# Altium PCB CH32H417MEU6-UHSIF-Top-R0.PcbDoc (part 2 of 2)
Units mil, origin at the board's own origin, x right, y up, seen from the top; angles counter-clockwise.
Board outline 2559.06 x 1771.65 mil, 4 copper layers (Top Layer, Layer 1, Layer 2, Bottom Layer), stack 23.756 mil thick; 56 components, 86 nets, 278 pads, 495 vias.
Unrouted connection lines stored in the file: 33.
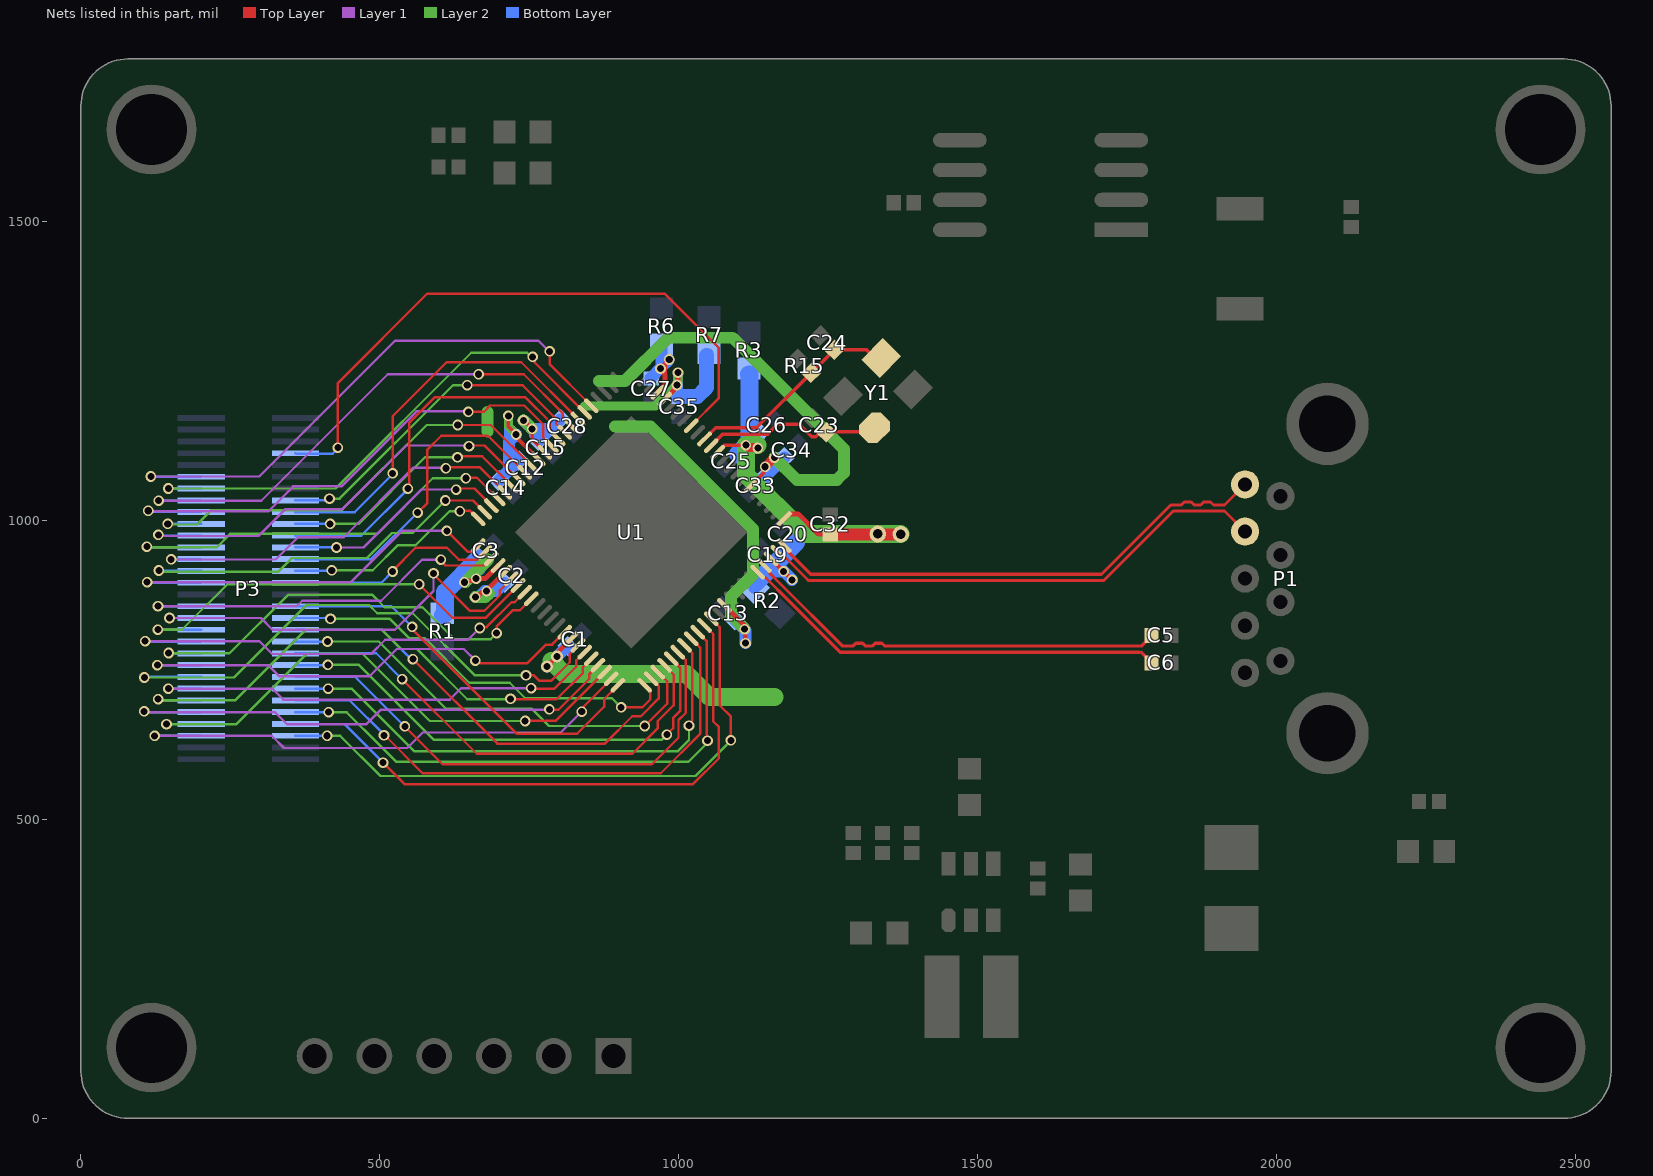
[diagram p4: the nets of this part, all layers, seen from the top]

## Via types
v1: diameter 17.72, hole 11.81, Top Layer to Bottom Layer, tented both sides, 470 vias
v2: diameter 23.62, hole 11.81, Top Layer to Bottom Layer, tented both sides, 12 vias
v3: diameter 28, hole 16, Top Layer to Bottom Layer, tented both sides, 10 vias
v4: diameter 19.68, hole 11.81, Top Layer to Bottom Layer, tented both sides, 3 vias

## Nets (pads, with @x,y where several pads share a name; then routed paths per layer and width w, separated by ;. In a path a pad name is that pad's centre, name@x,y a point inside that pad or via, vN(x,y) a via of type N, cw(c..) or ccw(c..) an arc to the next point about the centre after c; other vN are vias at no path point) (continued)
UFP6: P3.11 U1.27 | length 972.7
  Top Layer w4: v1(783.78,1282.63) 783.78,1261.5 U1.27@853.59,1191.68
  Layer 1 w4: v1(116.91,1073.29) 298.23,1073.29 525.38,1300.44 765,1300.44 782.81,1282.63 v1(783.78,1282.63)
  Bottom Layer w4: v1(116.91,1073.29) 117.37,1072.83 P3.11@201.26,1072.83
UFP7: P3.13 U1.28 | length 889.9
  Top Layer w4: v1(755.45,1273.24) 758.07,1270.62 758.07,1264.93 U1.28@842.45,1180.55
  Layer 2 w4: v1(146.21,1053.15) 425.65,1053.15 652.67,1280.17 746.25,1280.17 753.17,1273.24 v1(755.45,1273.24)
  Bottom Layer w4: v1(146.21,1053.15) P3.13@201.26,1053.15
UFP8: P3.18 U1.29 | length 672.4
  Top Layer w4: v1(521.35,1078.57) 521.35,1174.07 611.56,1264.28 736.45,1264.28 U1.29@831.32,1169.41
  Bottom Layer w4: P3.18@358.74,1013.78 457.98,1013.78 521.35,1077.14 v1(521.35,1078.57)
UFP9: P3.15 U1.30 | length 888.6
  Top Layer w4: v1(665.11,1244.27) 740.53,1244.27 806.09,1178.71 806.09,1172.37 U1.30@820.18,1158.28
  Layer 1 w4: v1(130.07,1032.96) 130.35,1032.67 301.55,1032.67 513.15,1244.27 v1(665.11,1244.27)
  Bottom Layer w4: v1(130.07,1032.96) 200.75,1032.96 P3.15@201.26,1033.46
UFP10: P3.16 U1.31 | length 567.7
  Top Layer w4: v1(646.1,1226.01) 738.64,1226.01 795.09,1169.57 795.09,1161.1 U1.31@809.05,1147.14
  Layer 2 w4: v1(415.8,1036.29) 432.7,1036.29 622.42,1226.01 v1(646.1,1226.01)
  Bottom Layer w4: P3.16@358.74,1033.46 409.26,1033.46 412.09,1036.29 v1(415.8,1036.29)
UFP11: P3.22 U1.32 | length 636.2
  Top Layer w4: v1(546.86,1052.86) 548.8,1054.79 548.8,1162.82 591.57,1205.6 743.5,1205.6 784.09,1165.01 784.09,1149.83 U1.32@797.91,1136.01
  Bottom Layer w4: P3.22@358.74,974.41 468.85,974.41 546.86,1052.42 v1(546.86,1052.86)
UFP12: P3.17 U1.33 | length 878.4
  Top Layer w4: v1(647.99,1181.43) 673.67,1181.43 684.34,1192.1 741.44,1192.1 773.09,1160.45 773.09,1138.56 U1.33@786.78,1124.87
  Layer 1 w4: v1(112.66,1016.02) 113.74,1014.94 313.26,1014.94 355.15,1056.83 435.67,1056.83 561.01,1182.18 647.24,1182.18 v1(647.99,1181.43)
  Bottom Layer w4: v1(112.66,1016.02) 114.64,1014.04 P3.17@201,1014.04
UFP13: P3.19 U1.36 | length 761.7
  Top Layer w4: v1(630.17,1159.4) 685.44,1159.4 U1.36@753.37,1091.47
  Layer 2 w4: v1(145.23,994.01) 146.22,993.03 194.2,993.03 218.28,1017.11 436.05,1017.11 578.33,1159.4 v1(630.17,1159.4)
  Bottom Layer w4: v1(145.23,994.01) 145.31,994.09 P3.19@201.26,994.09
UFP14: P3.26 U1.37 | length 546.7
  Top Layer w4: v1(563.27,1012.91) 579.53,1029.17 579.53,1118.39 602.69,1141.56 680.56,1141.56 741.79,1080.33 U1.37@742.23,1080.33
  Bottom Layer w4: P3.26@358.74,935.04 485.39,935.04 v1(563.27,1012.91)
UFP15: P3.21 U1.38 | length 761.3
  Top Layer w4: v1(649.11,1123.94) 650.32,1125.15 675.15,1125.15 U1.38@731.1,1069.19
  Layer 1 w4: v1(129.61,975.67) 131.47,973.81 297.06,973.81 342.06,1018.81 437.74,1018.81 544.08,1125.15 647.9,1125.15 v1(649.11,1123.94)
  Bottom Layer w4: v1(129.61,975.67) 130.87,974.41 P3.21@201.26,974.41
UFP16: P3.20 U1.39 | length 428.3
  Top Layer w4: v1(629.85,1105.35) 631.57,1107.08 670.94,1107.08 U1.39@719.96,1058.06
  Layer 2 w4: v1(416.84,994.08) 464.24,994.08 575.51,1105.35 v1(629.85,1105.35)
  Bottom Layer w4: P3.20@358.74,994.09 v1(416.84,994.08)
UFP17: P3.25 U1.40 | length 690.5
  Top Layer w4: v1(610.42,1087.1) 611.74,1088.43 667.32,1088.43 U1.40@708.83,1046.92
  Layer 1 w4: v1(150.89,934.7) 151.14,934.46 325.93,934.46 363.04,971.56 439.61,971.56 556.29,1088.24 609.28,1088.24 v1(610.42,1087.1)
  Bottom Layer w4: v1(150.89,934.7) 151.06,934.87 201.09,934.87 P3.25@201.26,935.04
UFP18: P3.23 U1.41 | length 742
  Top Layer w4: v1(643.87,1070.38) 644.61,1071.12 662.36,1071.12 U1.41@697.69,1035.79
  Layer 2 w4: v1(110.39,955.88) 111.54,954.72 227.09,954.72 249.58,977.22 495.5,977.22 588.53,1070.25 617.4,1070.25 617.53,1070.38 v1(643.87,1070.38)
  Bottom Layer w4: v1(110.39,955.88) 111.54,954.72 P3.23@201.26,954.72
UFP19: P3.24 U1.42 | length 380.5
  Top Layer w4: v1(627.48,1051.46) 629.17,1053.14 658.07,1053.14 U1.42@686.56,1024.65
  Layer 1 w4: v1(427.41,954.55) 472.83,954.55 569.74,1051.46 v1(627.48,1051.46)
  Bottom Layer w4: P3.24@358.74,954.72 427.23,954.72 v1(427.41,954.55)
UFP20: P3.27 U1.43 | length 674.8
  Top Layer w4: v1(609.4,1033.21) 655.73,1033.21 U1.43@675.42,1013.52
  Layer 2 w4: v1(130.43,916.12) 132.81,913.73 329.55,913.73 352.87,937.05 478.7,937.05 520.42,978.78 554.97,978.78 v1(609.4,1033.21)
  Bottom Layer w4: v1(130.43,916.12) 131.19,915.35 P3.27@201.26,915.35
UFP21: P3.28 U1.44 | length 352.6
  Top Layer w4: v1(633.9,1015.13) 634.49,1015.72 650.94,1015.72 U1.44@664.28,1002.38
  Layer 2 w4: v1(419.54,916.43) 488.11,916.43 530.21,958.53 559.86,958.53 616.45,1015.13 v1(633.9,1015.13)
  Bottom Layer w4: P3.28@358.74,915.35 418.46,915.35 v1(419.54,916.43)
UFP22: P3.29 U1.45 | length 699.5
  Top Layer w4: v1(611.97,982.42) 647.23,947.15 652.55,947.15 663.24,957.84 U1.45@664.28,957.84
  Layer 1 w4: v1(110.65,896.57) 110.95,896.27 450.83,896.27 536.98,982.42 v1(611.97,982.42)
  Bottom Layer w4: v1(110.65,896.57) 111.55,895.67 P3.29@201.26,895.67
UFP23: P3.30 U1.46 | length 355.1
  Top Layer w4: v1(521.23,914.37) 521.23,915.46 559.8,954.03 612.08,954.03 632.13,933.98 662.7,933.98 U1.46@675.42,946.7
  Bottom Layer w4: P3.30@358.74,895.67 502.53,895.67 v1(521.23,914.37)
UFP24: P3.33 U1.47 | length 672.5
  Top Layer w4: v1(602.05,934.38) 602.05,932.18 609.8,924.43 674.37,924.43 685.51,935.57 U1.47@686.56,935.57
  Layer 1 w4: v1(128.86,856.52) 361,856.52 370.07,865.58 502.18,865.58 570.98,934.38 v1(602.05,934.38)
  Bottom Layer w4: v1(128.86,856.52) 129.07,856.3 P3.33@201.26,856.3
UFP25: P3.35 U1.50 | length 743.9
  Top Layer w4: v1(589.69,911.34) 589.69,909.72 650.89,848.53 674.55,848.53 700.77,874.75 700.77,882.97 U1.50@719.96,902.16
  Layer 1 w4: v1(148.11,836.61) 301.01,836.61 320.93,816.69 524.87,816.69 589.69,881.51 v1(589.69,911.34)
  Bottom Layer w4: v1(148.11,836.61) P3.35@201.26,836.61
UFP26: P3.37 U1.51 | length 752.8
  Top Layer w4: v1(565.63,893.09) 621.88,836.84 676.91,836.84 711.77,871.7 U1.51@731.1,891.03
  Layer 2 w4: v1(128.58,817.27) 128.92,816.93 168.73,816.93 244.65,892.85 419.7,892.85 565.38,892.85 v1(565.63,893.09)
  Bottom Layer w4: v1(128.58,817.27) 128.92,816.93 P3.37@201.26,816.93
UFP27: P3.39 U1.52 | length 780.7
  Top Layer w4: v1(666.98,819.87) 668.47,821.36 678.5,821.36 720.11,862.97 725.32,862.97 U1.52@742.23,879.89
  Layer 1 w4: v1(107.43,797.95) 298.33,797.95 319.92,776.36 485.07,776.36 508.93,800.22 647.33,800.22 v1(666.98,819.87)
  Layer 2 w4: v1(107.43,797.95) v1@108.14,797.24
  Bottom Layer w4: v1@108.14,797.24 P3.39@201.26,797.24
UFP28: P3.41 U1.53 | length 767.1
  Top Layer w4: v1(695.23,811.36) 695.71,811.84 695.71,823.02 722.02,849.33 733.94,849.33 U1.53@753.37,868.75
  Layer 2 w4: v1(146.76,778.11) 147.31,777.56 248.44,777.56 346.24,875.36 487.59,875.36 508.24,854.71 571.06,854.71 624.36,801.42 685.29,801.42 v1(695.23,811.36)
  Bottom Layer w4: v1(146.76,778.11) 147.31,777.56 P3.41@201.26,777.56
UFP29: P3.43 U1.58 | length 813.5
  Top Layer w4: v1(659.72,765.38) 663.1,765.38 667.79,760.69 746.1,760.69 777.53,792.12 788.08,792.12 U1.58@809.05,813.08
  Layer 1 w4: v1(127.91,757.71) 128.07,757.87 313.16,757.87 331.99,739.04 482.35,739.04 528.1,784.79 640.31,784.79 v1(659.72,765.38)
  Layer 2 w4: v1(127.91,757.71) v1@128.46,757.16
  Bottom Layer w4: v1@128.46,757.16 200.54,757.16 P3.43@201.26,757.87
UFP30: P3.45 U1.60 | length 958.4
  Top Layer w4: v1(744.33,740.74) 757.67,740.74 767.02,731.39 786.34,731.39 817.45,762.5 817.45,776.94 U1.60@831.32,790.81
  Layer 2 w4: v1@107.12,738.19 v1(106.05,737.12) 255.93,737.12 377.22,858.41 481.93,858.41 495.66,844.69 554.95,844.69 658.9,740.74 v1(744.33,740.74)
  Bottom Layer w4: v1(106.05,737.12) 107.12,738.19 P3.45@201.26,738.19
UFP31: P3.47 U1.61 | length 798.9
  Top Layer w4: v1(752.83,719.22) 753.88,718.17 791.37,718.17 828.45,755.26 828.45,765.67 U1.61@842.45,779.67
  Layer 1 w4: v1(146.24,718.64) 146.43,718.45 320.29,718.45 338.69,700.05 616.64,700.05 635.81,719.22 v1(752.83,719.22)
  Layer 2 w4: v1(146.24,718.64) v1@146.38,718.5
  Bottom Layer w4: v1@146.38,718.5 P3.47@201.26,718.5
UFP32: P3.49 U1.62 | length 929.3
  Top Layer w4: v1(718.42,701.4) 719.05,700.77 795.31,700.77 839.45,744.91 839.45,754.4 U1.62@853.59,768.53
  Layer 2 w4: v1(129.11,700.82) 131.11,698.82 257.9,698.82 375.77,816.69 503.49,816.69 535.38,784.79 562.05,784.79 646.08,700.77 717.78,700.77 v1(718.42,701.4)
  Bottom Layer w4: v1(129.11,700.82) 131.11,698.82 P3.49@201.26,698.82
UFP33: P3.51 U1.63 | length 910.2
  Top Layer w4: v1(783.37,683.81) 783.98,683.19 798.71,683.19 850.45,734.93 850.45,743.13 U1.63@864.72,757.4
  Layer 1 w4: v1(105.8,680.42) 107.09,679.13 324.5,679.13 345.01,658.63 476.82,658.63 501.1,682.9 782.46,682.9 v1(783.37,683.81)
  Layer 2 w4: v1(105.8,680.42) v1@107.09,679.13
  Bottom Layer w4: v1@107.09,679.13 P3.51@201.26,679.13
UFP34: P3.53 U1.64 | length 920.5
  Top Layer w4: v1(742.94,664.31) 743.63,665 794.6,665 U1.64@875.86,746.26
  Layer 2 w4: v1(143.16,659.17) 260.19,659.17 378.2,777.18 470.46,777.18 583.33,664.31 v1(742.94,664.31)
  Bottom Layer w4: v1(143.16,659.17) 143.44,659.45 P3.53@201.26,659.45
UFP35: P3.55 U1.65 | length 901.4
  Top Layer w4: v1(837.56,680.14) 840.18,682.76 840.18,687.53 887,734.34 U1.65@887,735.13
  Layer 1 w4: v1(123.27,639.64) 319.08,639.63 339.4,619.31 545.84,619.31 571.64,645.12 802.54,645.12 v1(837.56,680.14)
  Layer 2 w4: v1(123.27,639.64) v1@123.4,639.76
  Bottom Layer w4: v1@123.4,639.76 P3.55@201.26,639.76
UFP36: P3.34 U1.66 | length 669.7
  Top Layer w4: v1@551.89,819.87 728.55,643.2 829.98,643.2 875.21,688.43 875.21,701.07 U1.66@898.13,723.99
  Bottom Layer w4: P3.34@358.74,856.3 519.5,856.3 v1(553.91,821.89)
UFP37: P3.36 U1.67 | length 688.3
  Top Layer w4: v1(903.38,687.19) 938.68,687.19 952.33,700.84 952.33,711.59 951.77,712.16 951.77,714.9 U1.67@942.67,723.99
  Layer 2 w4: v1(417.42,835.15) 516.8,835.15 548.96,802.99 574.64,802.99 649.26,728.37 717.19,728.37 743.2,702.36 888.21,702.36 v1(903.38,687.19)
  Bottom Layer w4: P3.36@358.74,836.61 415.96,836.61 v1(417.42,835.15)
UFP38: P3.38 U1.68 | length 755.8
  Top Layer w4: v1(555.07,767.93) 696.49,626.52 876.43,626.52 922.18,672.27 936.49,672.27 966.13,701.91 966.13,722.81 U1.68@953.81,735.13
  Bottom Layer w4: P3.38@358.74,816.93 503.29,816.93 552.28,767.93 v1(555.07,767.93)
UFP39: P3.40 U1.69 | length 755.1
  Top Layer w4: v1(942.98,656) 980.5,693.52 980.5,730.71 U1.69@964.94,746.26
  Layer 2 w4: v1(412.46,797.32) 438.57,797.32 438.62,797.27 498.2,797.27 610.93,684.55 754.35,684.55 782.9,656 v1(942.98,656)
  Bottom Layer w4: P3.40@358.74,797.24 412.38,797.24 v1(412.46,797.32)
UFP40: P3.42 U1.70 | length 816
  Top Layer w4: v1(537.23,734.26) 661.91,609.58 922.34,609.58 964.53,651.77 964.53,663.89 991.5,690.87 991.5,741.98 U1.70@976.08,757.4
  Bottom Layer w4: P3.42@358.74,777.56 493.93,777.56 v1(537.23,734.26)
UFP41: P3.44 U1.71 | length 819
  Top Layer w4: v1(979.83,641.56) 990.45,652.18 990.45,669.66 1002.5,681.71 1002.5,753.25 U1.71@987.22,768.53
  Layer 2 w4: v1(412.94,758.19) 464.79,758.19 589.64,633.34 971.57,633.34 v1(979.83,641.56)
  Bottom Layer w4: P3.44@358.74,757.87 412.63,757.87 v1(412.94,758.19)
UFP42: P3.46 U1.72 | length 873.3
  Top Layer w4: v1(541.7,655.32) 604.97,592.06 955.12,592.06 999.45,636.39 999.45,665.93 1011.5,677.99 1011.5,766.52 U1.72@998.35,779.67
  Bottom Layer w4: P3.46@358.74,738.19 458.84,738.19 v1(541.7,655.32)
UFP43: P3.48 U1.73 | length 875.4
  Top Layer w4: U1.73@1009.49,790.81 1022.6,777.69 1022.6,665.71 1016.89,660 v1(1016.89,656.51)
  Layer 2 w4: v1(413.6,718.5) 452.74,718.5 557.66,613.59 997.72,613.59 1016.89,632.76 v1(1016.89,656.51)
  Bottom Layer w4: P3.48@358.74,718.5 v1(413.6,718.5)
UFP44: P3.50 U1.74 | length 920.4
  Top Layer w4: v1(506.96,640.45) 508.07,640.45 571.52,577 969.61,577 1035.5,642.88 1035.5,787.06 U1.74@1020.62,801.94
  Bottom Layer w4: P3.50@358.74,698.82 449.7,698.82 506.96,641.56 v1(506.96,640.45)
UFP45: P3.52 U1.75 | length 928.7
  Top Layer w4: U1.75@1031.76,813.08 1046.5,798.33 1046.5,632.94 v1(1047.97,631.47)
  Layer 2 w4: v1(414.37,679.13) 444.43,679.13 499.98,623.59 500.23,623.59 527.9,595.91 1015.8,595.91 1047.97,628.08 v1(1047.97,631.47)
  Bottom Layer w4: P3.52@358.74,679.13 v1(414.37,679.13)
UFP46: P3.54 U1.76 | length 1000
  Top Layer w4: v1(505.26,594.71) 505.47,594.71 541.44,558.75 1023.56,558.75 1066.89,602.07 1066.89,654.09 1057.5,663.47 1057.5,809.6 U1.76@1042.89,824.21
  Bottom Layer w4: P3.54@358.74,659.45 440.74,659.45 505.26,594.93 v1(505.26,594.71)
UFP47: P3.56 U1.77 | length 998.1
  Top Layer w4: U1.77@1054.03,835.35 1068.5,820.88 1068.5,690.34 1087.07,671.76 v1(1087.07,631.85)
  Layer 2 w4: v1(411.71,639.76) 433.39,639.76 500.76,572.39 1027.61,572.39 v1(1087.07,631.85)
  Bottom Layer w4: P3.56@358.74,639.76 v1(411.71,639.76)
UFPCLK: P3.8 U1.15 | length 1070.3
  Top Layer w4: v1(429.83,1121.57) 429.83,1229.61 579.35,1379.12 975.75,1379.12 1066.89,1287.98 1066.89,1204.55 U1.15@1020.62,1158.28
  Bottom Layer w4: P3.8@358.74,1112.2 359.74,1111.2 420.89,1111.2 429.83,1120.14 v1(429.83,1121.57)
USB_SSRX_n: P1.6 U1.87 | length 863.2
  Top Layer w5.1: U1.87@1165.38,946.7 1174.27,937.82 1178.26,937.82 1213.43,902.65 1216.39,899.69 1710.99,899.69 1826.87,1015.57 1912.62,1015.57 P1.6@1946.94,981.25
USB_SSRX_p: P1.5 U1.88 | length 863.1
  Top Layer w5.1: U1.88@1176.52,957.84 1185.4,948.96 1185.4,944.96 1220.58,909.79 1706.8,909.79 1822.69,1025.67 1840.33,1025.67 1845.3,1030.65 1856.82,1030.65 1861.8,1025.67 1872.71,1025.67 1877.69,1030.65 1889.2,1030.65 1894.18,1025.67 1912.62,1025.67 P1.5@1946.94,1059.99
USB_SSTX_n: C6.1 U1.84 | length 719
  Top Layer w5.1: U1.84@1131.98,913.3 1140.86,904.41 1144.85,904.41 1163.38,885.89 1165.47,883.8 1269.92,779.35 1770.48,779.35 ; 1773.44,779.35 1790.41,762.39 C6.1@1790.41,761.4
USB_SSTX_p: C5.1 U1.85 | length 721.6
  Top Layer w5.1: U1.85@1143.11,924.43 1151.99,915.55 1151.99,911.56 1167.56,895.99 1274.1,789.45 1291,789.45 1295.98,794.43 1307.49,794.43 1312.47,789.45 1323.38,789.45 1328.36,794.43 1339.88,794.43 1344.85,789.45 1773.29,789.45 ; 1773.44,789.45 1790.41,806.42 C5.1@1790.41,807.4
VDD12A: C19.2 C20.2 R2.1 U1.86 | length 226.7
  Top Layer w7: U1.86@1154.25,935.57 v1(1175.3,914.52) v1(1189.44,900.37)
  Bottom Layer w20: R2.1@1126.29,886.55 R2.1@1126.29,897.14 ; 1144.37,910.98 1147.91,914.52 v1(1175.3,914.52) ; C19.2@1160.1,930.95 1158.2,929.05 1160.76,929.05 v1(1175.3,914.52) ; v1(1189.44,900.37) v1(1175.3,914.52)
  Bottom Layer w30: R2.1@1128.41,895.02 1144.37,910.98 ; 1147.91,914.52 C19.2@1160.32,926.93 ; C19.2@1162.22,928.82 C20.2@1196.17,962.78
VDD33: C1.1 C25.2 C26.2 C32.2 R3.1 U1.1 U1.11 U1.59 | length 1305
  Top Layer w6: U1.11@1065.16,1113.74 1077.24,1125.81 v1(1111.98,1125.81)
  Top Layer w8: v4@780.81,757.92 781.76,757.92 v4(796.08,772.25) ; U1.59@820.18,801.94 798.32,780.08 v4@798.32,771.18 ; U1.1@1176.52,1002.38 1184.78,1010.64 1199.38,1010.64 1233.49,976.53 C32.2@1253.13,976.53 ; v4@798.28,771.14 v4@798.32,771.18
  Top Layer w15: v1(1111.98,1125.81) 1112.71,1125.81 1117.13,1121.4 1131.61,1121.4 v1(1132.13,1120.88)
  Top Layer w20: C32.2@1253.13,976.53 1299.15,976.53 1370.87,976.53 v3(1371.12,976.78)
  Layer 2 w30: 786.8,764.76 808.33,743.22 1012.64,743.22 1051.29,704.57 1160.07,704.57 ; v1@1131.65,1125.81 v1(1111.98,1125.81) 1111.98,1076.79 1211.55,977.21 1300.87,977.21 v3(1332.57,977.21) v3@1370.55,977.21
  Bottom Layer w20: v4(779.36,755.52) 813.09,789.25 C1.1@814.64,789.25
  Bottom Layer w30: C25.2@1099.17,1110.9 1118.3,1130.04 1118.3,1243.62 R3.1@1117.6,1244.32
VDD33A: C27.2 R6.1 U1.20 | length 171.4
  Top Layer w8: U1.20@964.94,1213.96 976.81,1225.82 976.81,1243.56 976.02,1244.36 ; 976.02,1260.32 976.02,1244.36 ; v1@983.37,1272.16 983.37,1268.6 969.34,1254.57 v1(969.34,1253.66) 969.34,1251.03 976.02,1244.36
  Bottom Layer w20: C27.2@952.82,1237.89 v1@970.84,1255.91 ; v1(969.34,1253.66) 970.84,1255.15 v1@970.84,1255.91 ; R6.1@970.84,1293.86 v1@970.84,1255.91 ; v1@982.9,1267.97 v1@970.84,1255.91
  other v1: 983.9,1268.97
VDDIO: C12.1 C14.1 C35.2 R7.1 U1.19 U1.35 | length 757.2
  Top Layer w6: v1(714.75,1174.78) 714.75,1156.76 727.86,1143.65 v1(727.86,1143.52) ; v1@727.92,1143.59 730.16,1141.35 730.16,1136.94 U1.35@764.5,1102.6
  Top Layer w8: U1.19@984.39,1211.13 997.05,1223.79 997.05,1227.41 998.91,1229.28 998.77,1229.42 998.77,1246.98 v1(998.62,1247.12)
  Layer 2 w15: v1(714.75,1174.78) 715.27,1174.26 715.27,1165.55 715.27,1156.85 727.86,1144.26 v1(727.86,1143.52) ; 842.39,1191.26 960.9,1191.26 998.91,1229.27 998.77,1229.41 998.77,1246.98 v1(998.62,1247.12)
  Bottom Layer w15: v1(714.75,1174.78) 715.27,1174.26 715.27,1156.85 ; 716.24,1115.34 715.27,1116.31 715.27,1156.85 ; v1(727.86,1143.52) 727.86,1144.26 715.27,1156.85 ; v1@998.62,1223.22 v1(998.62,1247.12) ; v1@998.91,1229.27 999.43,1228.75 999.43,1207.61 C35.2@1000.31,1206.73 ; R7.1@1046.29,1275.34 R7.1@1050.61,1279.67
  Bottom Layer w20: v1(727.86,1143.52) 716.24,1131.91 716.24,1115.34 ; 716.24,1115.34 716.24,1083.69 C14.1@699.07,1066.51 C12.1@732.07,1099.51 716.24,1115.34
  Bottom Layer w25: C35.2@1000.31,1206.73 1030.89,1206.73 1046.29,1222.13 R7.1@1046.29,1275.34
  other v1: 996.91,1226.27
VDDK: C3.2 C33.2 C34.2 R1.1 U1.6 U1.48 | length 1112.9
  Top Layer w6: U1.6@1120.84,1058.06 1142.02,1079.24 1142.02,1087.33 v1(1144.26,1089.57)
  Top Layer w8: v1@643.47,897.12 645.33,898.98 654.91,898.98 658.44,902.51 v1(661.07,902.51) 675.77,902.51 U1.48@697.69,924.43
  Top Layer w15: v1(1144.26,1089.57) v1(1159.8,1105.11)
  Layer 2 w20: v1@643.47,897.12 654.96,908.62 680.78,934.43 ; 679.73,1148.17 679.73,1159.8 679.73,1180.83 ; 866.29,1232.98 909.95,1232.98 982.31,1305.34 1090.05,1305.34 1276.08,1119.3 1276.08,1079.35 1264.37,1067.63 1197.28,1067.63 v1(1159.8,1105.11)
  Bottom Layer w20: v1@655.92,907.66 666.3,918.04 666.3,933.63 667,934.33 667,936.89 C3.2@666.3,937.59 ; C33.2@1140.65,1069.42 C34.2@1176.66,1105.44
  Bottom Layer w30: R1.1@605.33,841.21 608.55,844.42 608.55,879.83 C3.2@664.89,936.17
  other v1: 641.35,896.42
VIO18: C2.1 C13.1 C15.2 C28.2 U1.34 U1.49 U1.79 | length 990.2
  Top Layer w6: v1(740.19,1167.22) 740.32,1167.22 754.59,1152.95 v1(754.72,1152.95) 754.72,1134.65 U1.34@775.64,1113.74
  Top Layer w8: v1(659.77,871.51) 662.4,871.51 670.63,879.74 676.54,879.74 v1(678.39,881.6) 678.39,882.78 708.83,913.21 U1.49@708.83,913.3 ; U1.79@1076.3,857.62 v1@1108.27,825.65 ; v1(1110.13,818.16) 1108.27,820.02 v1@1108.27,825.65 ; v1(1111.5,794.5) 1111.02,794.98 1111.02,822.9 v1@1108.27,825.65
  Layer 2 w20: v1(659.77,871.51) 676.43,871.51 v1@682.45,877.54 ; v1(740.19,1167.22) 740.45,1167.22 v1(754.72,1152.95) ; 893.02,1156.62 952.69,1156.62 1124.02,985.29 1124.02,908.94 1087.02,871.93 1087.02,841.27 v1(1110.13,818.16)
  Bottom Layer w20: v1(659.77,871.51) 665.49,871.51 675.58,881.6 v1(678.39,881.6) 694.59,881.6 C2.1@708.44,895.45 ; v1(740.19,1167.22) 747.33,1160.09 747.59,1160.09 v1(754.72,1152.95) ; C15.2@765.7,1133.14 C15.2@766.39,1133.84 ; C28.2@801.39,1168.84 783.44,1150.88 ; C13.1@1094.58,833.01 v1@1109.44,818.16 ; v1(1110.13,818.16) v1@1109.44,818.16 ; v1(1111.5,794.5) 1111.5,816.09 1109.78,817.81 v1@1109.44,818.16 ; v1(754.72,1152.95) 781.36,1152.95 783.44,1150.88 ; v1(754.72,1152.95) 759.68,1148 759.68,1143.12 766.39,1136.4 C15.2@766.39,1133.84 ; C15.2@766.39,1133.84 783.44,1150.88
XI: C23.2 U1.12 Y1.1 | length 303
  Top Layer w6: U1.12@1054.03,1124.87 1072.83,1143.67 1147.65,1143.67 1164.64,1160.65 1201.52,1160.65 1222.37,1139.81 1228.89,1139.81 1234.58,1145.5 1240.41,1145.5 1242.74,1147.83 1320.56,1147.83 Y1.1@1327.41,1154.68
XO: C24.2 R15.2 U1.13 Y1.3 | length 363.8
  Top Layer w6: U1.13@1042.89,1136.01 1061.56,1154.67 1129.69,1154.67 R15.2@1221.48,1246.47 C24.2@1260.38,1285.36 1261.07,1286.05 1273.53,1286.05 1274.23,1285.36 1313.92,1285.36 1327.67,1271.6 Y1.3@1338.55,1271.6
pads on no net: ?.0 U1.7 U1.8 U1.9 U1.10 U1.21 U2.1

## Polygon pours and split planes (outlines as drawn)
GND on Layer 2 "GND" (solid, remove dead copper, pour order 15): -4.21,1780.03 -4.21,0 2559.06,0 2559.06,1770.64
+5V on Layer 2 "+5V" (solid, remove dead copper, pour order 2): 2163.63,568.73 2127.51,532.61 1985.62,532.61 1975.2,522.18 1975.2,390.57 1985.62,380.15 2239.72,380.15 2256.54,396.97 2256.54,429.43 2256.54,808.06 2251.11,813.49 2006.24,813.49 1980.56,787.8 1980.56,738.05 1990.12,729.02 2139.43,729.02 2163.63,704.83
VIO18 on Layer 2 "VIO18" (solid, remove dead copper, pour order 14): 747.45,1043.62 846.39,1142.55 947.08,1142.55 1107.83,981.8 1107.83,937 1070.94,900.1 1070.94,801.03 1086.49,785.48 1114.99,785.48 1123.14,793.62 1123.14,873.95 1145.89,896.7 1145.89,1002.02 977.37,1170.54 762.23,1170.54 749.03,1183.74 735.27,1183.74 724.03,1172.51 724.03,1169.7 724.93,1162.84 748.55,1139.21 749.18,1121.7 708.83,1081.34 708.83,891.03 701.33,883.53 648.34,883.53 644.16,879.34 644.16,859.8 648.9,855.05 732.1,855.05 747.45,870.41
VDDK on Layer 2 "VDDK" (solid, remove dead copper, pour order 12): 628.36,894.63 628.36,910 640.64,922.28 664.15,922.28 666.6,924.73 666.6,1095.82 666.6,1219.43 704.15,1256.98 914.34,1256.98 980.5,1323.13 1119.99,1323.13 1295.48,1147.64 1295.48,1054.05 1293.61,1052.17 1172.24,1052.17 1133.38,1091.03 1132.77,1094.63 1132.77,1099.66 1152.74,1119.63 1174.62,1119.63 1207.69,1086.56 1229.19,1086.56 1240.24,1097.62 1240.24,1124.55 1080.18,1284.61 981.38,1284.61 914.73,1217.96 852.64,1217.96 847.27,1223.33 722.68,1223.33 700.84,1201.49 700.84,1108.49 700.84,909.5 680.86,889.53 633.46,889.53
VDD33 on Layer 2 "VDD33" (solid, remove dead copper, pour order 10): 1275.84,781.9 1275.84,877.51 1297.56,899.23 1373.32,899.23 1386.14,912.05 1386.14,985.3 1381.36,990.08 1225.34,990.08 1132.77,1082.65 1132.77,1106.61 1134.77,1108.6 1138.01,1108.6 1148.99,1119.58 1148.99,1143.54 1143.25,1149.28 1087.1,1149.28 1083.59,1145.78 1083.59,1074.29 1218.26,939.62 1218.26,799.58 1153.48,734.8 1063.79,734.8 1022.18,776.4 833.24,776.4 825.98,783.66 769.08,783.66 761.82,776.4 761.82,749.15 786.48,724.48 1000.47,724.48 1045.84,679.11 1173.05,679.11
VDDIO on Layer 2 "VDDIO" (solid, remove dead copper, pour order 13): 710.09,1122.25 738.1,1122.25 743.24,1127.39 743.24,1142.91 727.06,1159.09 727.06,1173.27 742.14,1188.35 810.65,1188.35 820.89,1178.11 977.08,1178.11 1013.71,1214.74 1013.71,1250.73 1007.18,1257.26 992.66,1257.26 986.04,1250.64 986.04,1236.87 960.7,1211.53 849.13,1211.53 845.93,1214.74 723.18,1214.74 704.19,1195.75 704.19,1125.07
GND on Bottom Layer "GND" (solid, remove dead copper, pour order 17): 7.41,1771.65 7.41,0 2559.06,0 2559.06,1771.65
3V3 on Bottom Layer "3V3" (solid, remove dead copper, pour order 16): 1545.99,561.43 1566.09,541.33 1566.09,493.75 1561.28,489 1477.21,489 1471.55,494.66 1471.55,1246.66 1327.72,1390.49 1164.31,1390.49 1149.07,1375.24 1149.07,1304.57 1142.66,1298.16 1106.33,1298.16 1083.25,1321.23 1031.81,1321.23 1016.89,1336.15 957.06,1336.15 949.68,1343.54 949.68,1432.4 934.2,1448.81 818.25,1448.81 789.6,1420.16 558.63,1420.16 543.07,1405.32 543.07,1185.32 523.13,1166.28 135.57,1166.28 129.84,1172.01 129.84,1252.57 150.32,1273.05 442.44,1273.05 453.9,1284.51 453.9,1509.32 458.68,1515.6 744.93,1515.6 811.88,1582.55 1407.76,1582.55 1420.02,1570.65 1420.02,1429.11 1545.99,1303.14
1V2 on Bottom Layer "1V2" (solid, remove dead copper, pour order 11): 1176.7,434.19 1164.01,421.5 650.88,421.5 635.36,437.03 635.36,793.08 625.65,802.78 585.39,802.78 574.41,791.8 574.41,357.2 593.58,338.02 1155.24,338.02 1166.5,326.76 1166.5,261.85 1173.95,254.39 1283.28,254.39 1292.6,263.71 1292.6,422.12 1248.5,466.23 1248.5,819.27 1198.87,868.9 1168.58,868.9 1146.01,846.33 1146.01,836.28 1176.7,805.59
GND on Layer 1 "GND" (solid, remove dead copper, pour order 9): 4.79,1771.84 4.79,0 2559.06,0 2559.06,1765.3
GND on Top Layer "GND" (solid, remove dead copper, pour order 20): 2559.06,0 -0.09,0 -0.09,1771.65 2559.06,1771.65

## Keep-outs
Keep-Out Layer:
  the board outline again, w10

## Other copper
Top Layer:
  pour cut-out: 1425.85,282.05 1425.85,125.79 1560.84,125.79 1560.84,280.01
  region net 3V3: 1479.38,406.16 1498.1,406.16 1501.39,409.45 1501.39,463.07 1549.95,511.64 1559.31,511.64 1563.36,515.69 1563.36,547.3 1557.04,553.63 1469.52,553.63 1464.96,549.07 1464.96,479.77 1476.6,468.13 1476.6,410.21
  region net NetL2_1: 1514.29,350.59 1514.29,151.91 1526.25,139.94 1555.11,139.94 1563.55,148.39 1563.55,337.34 1550.3,350.59
  region net 1V2: 1446.69,155.91 1446.69,247.11 1442.42,251.38 1335.71,251.38 1322.02,265.08 1322.02,335.81 1320.65,337.18 1198.84,337.18 1192.95,331.29 1192.95,274.47 1201.89,265.08 1253.83,265.08 1264.35,254.56 1264.35,159.8 1268.15,155.91
  region net +5V: 2082.65,405.9 2091.16,414.4 2091.16,498 2087.25,501.91 1565.84,501.91 1513.61,449.68 1513.61,411.43 1519.14,405.9
  pour cut-out: 919.81,1222.64 674.43,977.26 916.76,734.92 1160.81,978.98
  pour cut-out: 1522.03,610.92 1255.96,610.92 1125.48,741.39 1125.48,843.37 1086.37,882.49 1086.37,905.24 1161.92,980.79 1702.22,980.79 1836.75,1115.32 2040.69,1115.52 2169.99,986.22 2169.99,767.95 2012.64,610.6 2002.25,610.6
Layer 1:
  region net GND: 709.94,999.2 924.45,784.69 1127.26,987.51 912.76,1202.02
Layer 2:
  region net GND: 913.33,1126.38 938.41,1126.38 1096.17,968.61 1096.17,960.32 1095.35,960.32 932.96,797.92 924.33,797.92 791,931.25 791,956.17 774.14,973.04 774.14,990.93 804.18,1020.97
Bottom Layer:
  rectangle net GND: 290.8,1128.06 410.11,1158.75
  region net GND: 940.25,1146.18 1092.22,994.21 1092.22,976.03 924.94,808.75 892.45,808.75 753.38,947.82 753.38,995.53 918.6,1160.75

## Silkscreen, mask and mechanical layers (free items; w line width, h text height)
Top Overlay:
  text "RESET" at 2061.96,1347.19 h35 r90
  text "SWCLK" at 767.17,339.92 h35 r270
  text "SWDIO" at 666.41,334.09 h35 r270
  text "3V3" at 464.9,269.95 h35 r270
  text "GND" at 565.66,269.95 h35 r270
  text "TX6" at 867.92,269.95 h35 r270
  text "5V" at 364.15,234.96 h35 r270
  text "CH32H417MEU6-UHSIF-Top-R0-1v2" at 1172.63,26.78 h35
Mechanical 1:
  the board outline again, w10

## Text inside footprints (layer, text, board x,y; h text height)
LED1: Top Overlay "+" at 2318.11,457.26 h40 r270
LED2: Top Overlay "+" at 806.88,1660.28 h40 r270
LED3: Top Overlay "+" at 806.88,1591.63 h40 r270
P1: Bottom Overlay "V" at 2135.99,780.72 h31.5 r180; Bottom Overlay "D-" at 2135.99,872.72 h31.5 r180; Bottom Overlay "D+" at 2135.99,952.72 h31.5 r180; Bottom Overlay "G" at 2135.99,1052.72 h31.5 r180; Bottom Overlay "R-" at 2046.99,1070.72 h31.5 r180; Bottom Overlay "R+" at 2046.99,999.72 h31.5 r180; Bottom Overlay "G" at 2046.99,917.72 h31.5 r180; Bottom Overlay "T-" at 2046.99,835.72 h31.5 r180; Bottom Overlay "T+" at 2046.99,759.72 h31.5 r180